# Allegro board EGC_LAB_V100R001.brd
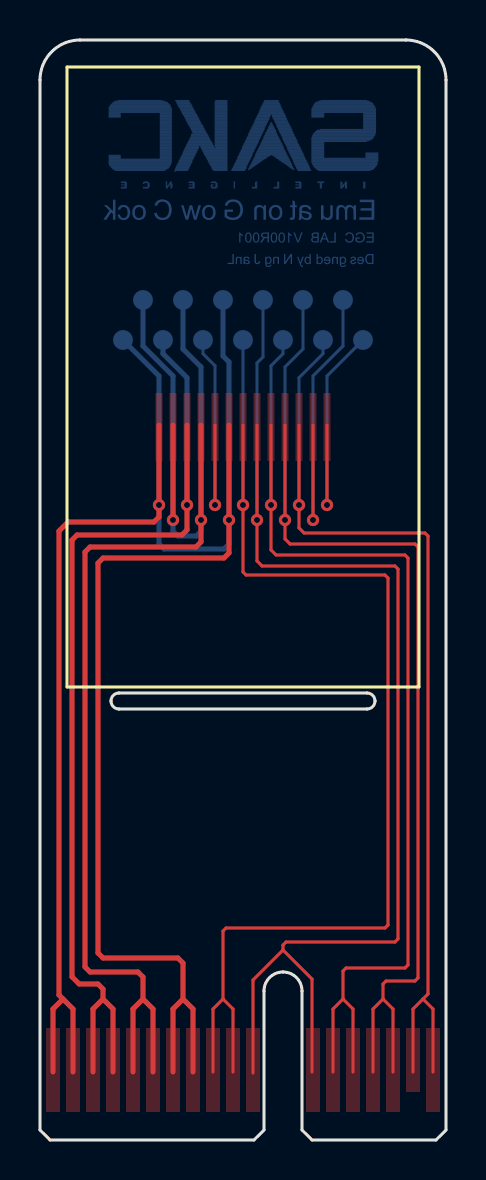
[diagram p0: board, top side]
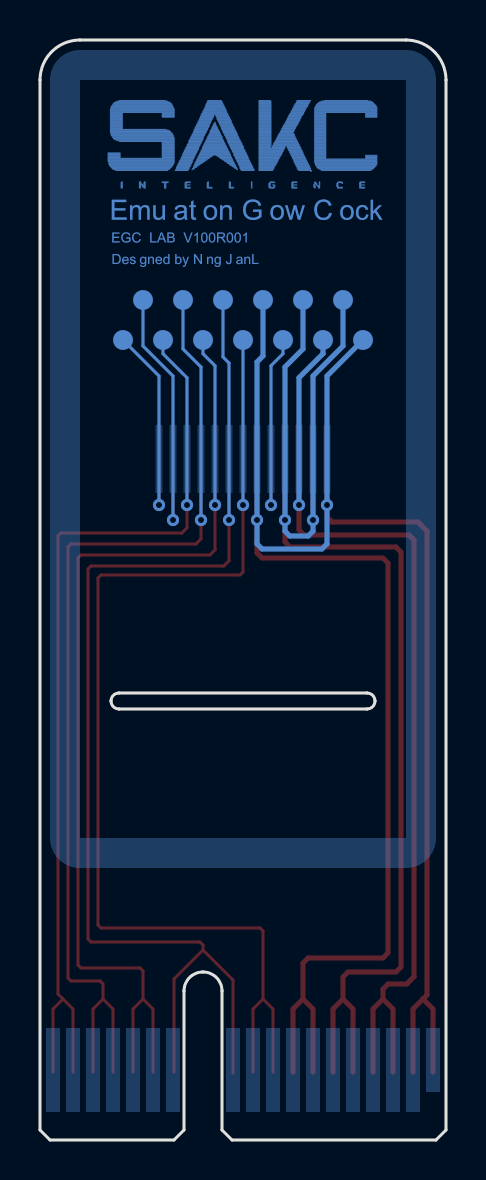
[diagram p1: board, bottom side, seen from below]

Outline 20.3 x 55 mm; copper layers: TOP, BOTTOM. Coordinates in mm from the lower left corner of the outline.
Outline path: 0,53 arc(0.59,54.41) 2,55 18.3,55 arc(19.71,54.41) 20.3,53 20.3,0.5 19.8,0 13.6,0 13.1,0.5 13.1,7.45 arc(12.82,8.12) 12.15,8.4 arc(11.48,8.12) 11.2,7.45 11.2,0.5 10.7,0 0.5,0 0,0.5 0,53 ; 3.55,21.95 arc(3.67,22.23) 3.95,22.35 16.35,22.35 arc(16.63,22.23) 16.75,21.95 arc(16.63,21.67) 16.35,21.55 3.95,21.55 arc(3.67,21.67) 3.55,21.95

## Design rules (mm)
constraint set DEFAULT: min track width 0.152

## Placement (name value [footprint] x y rotation side)
NOREF  -  []  0.5 0 90 top
NOREF#2  -  []  13.64 40 0 top
NOREF#3  -  []  7.64 40 0 top
NOREF#4  -  []  0.5 0 90 top
NOREF#5  -  []  19 2.4 90 top
NOREF#6  -  []  0 0 0 top
NOREF#7  -  []  3.64 40 0 top
NOREF#8  -  []  0 0 0 top
NOREF#9  -  []  4.64 42 0 top
NOREF#10  -  []  8.64 42 0 top
NOREF#11  -  []  5.64 40 0 top
NOREF#12  -  []  13.65 3.5 0 top
NOREF#13  -  []  10.65 3.5 0 top
NOREF#14  -  []  0.65 3.5 0 top
NOREF#15  -  []  0.5 0 90 top
NOREF#16  -  []  6.64 42 0 top
NOREF#17  -  []  0 0.5 0 top
NOREF#18  -  []  15.64 40 0 top
NOREF#19  -  []  9.64 40 0 top
NOREF#20  -  []  11.2 7.45 0 top
NOREF#21  -  []  12.15 7.45 0 top
NOREF#22  -  []  14.64 42 0 top
NOREF#23  -  []  12.64 42 0 top
NOREF#24  -  []  11.64 40 0 top
NOREF#25  -  []  20 1.4 90 top
NOREF#26  -  []  15.3 1.4 0 top
NOREF#27  -  []  10.64 42 0 top
NOREF#28  -  []  16.65 3.5 0 top
TP1  TestPoint1R0  [TP39]  16.15 40 180 bottom
TP2  TestPoint1R0  [TP39]  15.15 42 180 bottom
TP3  TestPoint1R0  [TP39]  14.15 40 180 bottom
TP4  TestPoint1R0  [TP39]  13.15 42 180 bottom
TP5  TestPoint1R0  [TP39]  12.15 40 180 bottom
TP6  TestPoint1R0  [TP39]  11.15 42 180 bottom
TP7  TestPoint1R0  [TP39]  10.15 40 180 bottom
TP8  TestPoint1R0  [TP39]  9.15 42 180 bottom
TP9  TestPoint1R0  [TP39]  8.15 40 180 bottom
TP10  TestPoint1R0  [TP39]  7.15 42 180 bottom
TP11  TestPoint1R0  [TP39]  6.15 40 180 bottom
TP12  TestPoint1R0  [TP39]  5.15 42 180 bottom
TP13  TestPoint1R0  [TP39]  4.15 40 180 bottom

## Library data of the parts
TP1-TP13 = TestPoint1R0

## Footprints (pads in the part's own frame, mm; a bottom-side part is the same pattern mirrored in y, then rotated)
TP39
  round 0.991 smd: 1(0,0)

## Nets
LCD_CS#: TP7.1
LCD_GND: TP8.1 TP13.1
LCD_LEDK: TP11.1
LCD_NC1: TP1.1
LCD_NC2: TP2.1
LCD_NC3: TP9.1
LCD_RS: TP5.1
LCD_RST#: TP6.1
LCD_SCL: TP4.1
LCD_SDA: TP3.1
LCD_VDD: TP10.1 TP12.1

## Via types
v1: diameter 0.61, hole 0.305, TOP to BOTTOM, 13 vias

## Routing (per net, layer and track width the routed paths; a pad name or vN(x,y) marks a point on that pad's centre or on a via; arc(x,y) is an arc through that point)
LCD_CS#: length 59.8
  TOP w0.152: 9.15,7.05 8.65,6.55 8.65,3.4 ; 9.15,7.05 9.65,6.55 9.65,3.4 ; 9.15,7.05 9.15,10.45 9.3,10.6 17.25,10.6 17.4,10.75 17.4,28.1 17.25,28.25 10.3,28.25 10.15,28.4 v1(10.15,31.75) 10.15,35.75
  BOTTOM w0.152: TP7.1 v1(10.15,31.75)
LCD_GND: length 114.7
  TOP w0.254: 0.65,3.4 0.65,6.55 1.15,7.05 ; 7.15,7.05 7.65,6.55 7.65,3.4 ; 7.15,7.05 6.65,6.55 6.65,3.4 ; 7.15,7.05 7.15,8.85 6.9,9.1 3.15,9.1 2.9,9.35 2.9,28.85 3.15,29.1 9.2,29.1 9.45,29.35 v1(9.45,31) 9.45,35.75 ; 1.15,7.05 1.65,6.55 1.65,3.4 ; 1.15,7.05 0.95,7.25 0.95,30.45 1.4,30.9 5.7,30.9 5.95,31.15 v1(5.95,31.75) 5.95,35.75
  BOTTOM w0.254: TP8.1 9.15,39.2 9.45,38.9 v1(9.45,31) 9.45,29.8 9.2,29.55 6.2,29.55 5.95,29.8 v1(5.95,31.75) 5.95,38.2 TP13.1
LCD_LEDK: length 51.8
  TOP w0.254: 3.15,7.05 3.65,6.55 3.65,3.4 ; 3.15,7.05 3.15,7.55 2.9,7.8 1.96,7.8 1.6,8.16 1.6,30 1.85,30.25 7.1,30.25 7.35,30.5 v1(7.35,31.75) 7.35,35.75 ; 3.15,7.05 2.65,6.55 2.65,3.4
  BOTTOM w0.254: v1(7.35,31.75) 7.35,38.11 6.15,39.31 TP11.1
LCD_NC1: length 13
  TOP w0.152: v1(14.35,31.75) 14.35,35.75
  BOTTOM w0.152: v1(14.35,31.75) 14.35,38.2 TP1.1
LCD_NC2: length 16.4
  TOP w0.152: v1(13.65,31) 13.65,35.75
  BOTTOM w0.152: TP2.1 15.15,39.7 13.65,38.2 v1(13.65,31)
LCD_NC3: length 12.5
  TOP w0.152: 8.75,35.75 v1(8.75,31.75)
  BOTTOM w0.152: TP9.1 8.15,39.31 8.75,38.71 v1(8.75,31.75)
LCD_RS: length 54.6
  TOP w0.152: 11.55,35.75 v1(11.55,31.75) 11.55,29.5 11.8,29.25 18.25,29.25 18.4,29.1 18.4,8.75 18.25,8.6 15.3,8.6 15.15,8.45 15.15,7.05 ; 15.15,7.05 14.65,6.55 14.65,3.4 ; 15.15,7.05 15.65,6.55 15.65,3.4
  BOTTOM w0.152: v1(11.55,31.75) 11.55,38.71 12.15,39.31 TP5.1
LCD_RST#: length 63.2
  TOP w0.152: 13.6,3.4 13.6,8.05 12.15,9.5 ; 10.85,35.75 v1(10.85,31) 10.85,28.95 11.1,28.7 17.75,28.7 17.9,28.55 17.9,10.05 17.75,9.9 12.3,9.9 12.15,9.75 12.15,9.5 ; 12.15,9.5 10.65,8 10.65,3.35
  BOTTOM w0.152: TP6.1 11.15,39.15 10.85,38.85 v1(10.85,31)
LCD_SCL: length 55.8
  TOP w0.152: 17.15,7.05 16.65,6.55 16.65,3.4 ; 17.15,7.05 17.15,7.8 17.3,7.95 18.75,7.95 18.9,8.1 18.9,29.65 18.75,29.8 12.5,29.8 12.25,30.05 v1(12.25,31) 12.25,35.75 ; 17.15,7.05 17.65,6.55 17.65,3.4
  BOTTOM w0.152: TP4.1 13.15,39.55 12.25,38.65 v1(12.25,31)
LCD_SDA: length 51.5
  TOP w0.152: 19.15,7.05 19.65,6.55 19.65,3.4 ; 19.15,7.05 18.65,6.55 18.65,3.4 ; 19.15,7.05 19.4,7.3 19.4,30.2 19.25,30.35 13.2,30.35 12.95,30.6 v1(12.95,31.75) 12.95,35.75
  BOTTOM w0.152: v1(12.95,31.75) 12.95,38.11 14.15,39.31 TP3.1
LCD_VDD: length 75
  TOP w0.254: 5.15,7.05 5.65,6.55 5.65,3.4 ; 5.15,7.05 5.15,8.15 4.9,8.4 2.5,8.4 2.25,8.65 2.25,29.4 2.5,29.65 7.8,29.65 8.05,29.9 v1(8.05,31) 8.05,35.75 ; 5.15,7.05 4.65,6.55 4.65,3.4 ; 6.65,35.75 v1(6.65,31)
  BOTTOM w0.254: TP12.1 5.15,39.7 6.65,38.2 v1(6.65,31) 6.65,30.44 6.89,30.2 7.81,30.2 8.05,30.44 v1(8.05,31) 8.05,38.65 7.15,39.55 TP10.1

## Copper pours and planes (outline as drawn; the poured copper is in the pictures)
LCD_CS# on TOP: 10,1.4 10,5.6 9.3,5.6 9.3,1.4
LCD_CS# on TOP: 9.97,33.95 9.97,37.35 10.32,37.35 10.32,33.95
LCD_CS# on TOP: 9,1.4 9,5.6 8.3,5.6 8.3,1.4
LCD_CS# on BOTTOM: 9.97,32.35 9.97,35.75 10.32,35.75 10.32,32.35
LCD_GND on TOP: 2,1.4 2,5.6 1.3,5.6 1.3,1.4
LCD_GND on TOP: 9.28,33.95 9.28,37.35 9.62,37.35 9.62,33.95
LCD_GND on TOP: 7,1.4 7,5.6 6.3,5.6 6.3,1.4
LCD_GND on TOP: 8,1.4 8,5.6 7.3,5.6 7.3,1.4
LCD_GND on TOP: 1,1.4 1,5.6 0.3,5.6 0.3,1.4
LCD_GND on TOP: 5.78,33.95 5.78,37.35 6.12,37.35 6.12,33.95
LCD_GND on BOTTOM: 5.78,32.35 5.78,35.75 6.12,35.75 6.12,32.35
LCD_GND on BOTTOM: 9.28,32.35 9.28,35.75 9.62,35.75 9.62,32.35
LCD_LEDK on TOP: 3,1.4 3,5.6 2.3,5.6 2.3,1.4
LCD_LEDK on TOP: 4,1.4 4,5.6 3.3,5.6 3.3,1.4
LCD_LEDK on TOP: 7.17,33.95 7.17,37.35 7.53,37.35 7.53,33.95
LCD_LEDK on BOTTOM: 7.17,32.35 7.17,35.75 7.53,35.75 7.53,32.35
LCD_NC1 on TOP: 14.18,33.95 14.18,37.35 14.53,37.35 14.53,33.95
LCD_NC1 on BOTTOM: 14.18,32.35 14.18,35.75 14.53,35.75 14.53,32.35
LCD_NC2 on TOP: 13.47,33.95 13.47,37.35 13.82,37.35 13.82,33.95
LCD_NC2 on BOTTOM: 13.47,32.35 13.47,35.75 13.82,35.75 13.82,32.35
LCD_NC3 on TOP: 8.57,33.95 8.57,37.35 8.93,37.35 8.93,33.95
LCD_NC3 on BOTTOM: 8.57,32.35 8.57,35.75 8.93,35.75 8.93,32.35
LCD_RS on TOP: 16,1.4 16,5.6 15.3,5.6 15.3,1.4
LCD_RS on TOP: 15,1.4 15,5.6 14.3,5.6 14.3,1.4
LCD_RS on TOP: 11.38,33.95 11.38,37.35 11.72,37.35 11.72,33.95
LCD_RS on BOTTOM: 11.38,32.35 11.38,35.75 11.72,35.75 11.72,32.35
LCD_RST# on TOP: 10.68,33.95 10.68,37.35 11.03,37.35 11.03,33.95
LCD_RST# on TOP: 11,1.4 11,5.6 10.3,5.6 10.3,1.4
LCD_RST# on TOP: 14,1.4 14,5.6 13.3,5.6 13.3,1.4
LCD_RST# on BOTTOM: 10.68,32.35 10.68,35.75 11.03,35.75 11.03,32.35
LCD_SCL on TOP: 17,1.4 17,5.6 16.3,5.6 16.3,1.4
LCD_SCL on TOP: 12.07,33.95 12.07,37.35 12.43,37.35 12.43,33.95
LCD_SCL on TOP: 18,1.4 18,5.6 17.3,5.6 17.3,1.4
LCD_SCL on BOTTOM: 12.07,32.35 12.07,35.75 12.43,35.75 12.43,32.35
LCD_SDA on TOP: 19,2.4 19,5.6 18.3,5.6 18.3,2.4
LCD_SDA on TOP: 12.78,33.95 12.78,37.35 13.12,37.35 13.12,33.95
LCD_SDA on TOP: 20,1.4 20,5.6 19.3,5.6 19.3,1.4
LCD_SDA on BOTTOM: 12.78,32.35 12.78,35.75 13.12,35.75 13.12,32.35
LCD_VDD on TOP: 5,1.4 5,5.6 4.3,5.6 4.3,1.4
LCD_VDD on TOP: 6,1.4 6,5.6 5.3,5.6 5.3,1.4
LCD_VDD on TOP: 6.47,33.95 6.47,37.35 6.83,37.35 6.83,33.95
LCD_VDD on TOP: 7.88,33.95 7.88,37.35 8.22,37.35 8.22,33.95
LCD_VDD on BOTTOM: 7.88,32.35 7.88,35.75 8.22,35.75 8.22,32.35
LCD_VDD on BOTTOM: 6.47,32.35 6.47,35.75 6.83,35.75 6.83,32.35
Net_73 on BOTTOM: 2,54.5 0.94,54.06 0.5,53 0.5,15.1 0.94,14.04 2,13.6 18.3,13.6 19.36,14.04 19.8,15.1 19.8,53 19.36,54.06 18.3,54.5 ; 1 cut-out
Net_74 on BOTTOM: 9,1.4 9,5.6 8.3,5.6 8.3,1.4
Net_74 on BOTTOM: 20,1.4 20,5.6 19.3,5.6 19.3,1.4
Net_74 on BOTTOM: 2,1.4 2,5.6 1.3,5.6 1.3,1.4
Net_74 on BOTTOM: 19,1.4 19,5.6 18.3,5.6 18.3,1.4
Net_74 on BOTTOM: 3,1.4 3,5.6 2.3,5.6 2.3,1.4
Net_74 on BOTTOM: 14,1.4 14,5.6 13.3,5.6 13.3,1.4
Net_74 on BOTTOM: 1,2.4 1,5.6 0.3,5.6 0.3,2.4
Net_74 on BOTTOM: 6,1.4 6,5.6 5.3,5.6 5.3,1.4
Net_74 on BOTTOM: 7,1.4 7,5.6 6.3,5.6 6.3,1.4
Net_74 on BOTTOM: 18,1.4 18,5.6 17.3,5.6 17.3,1.4
Net_74 on BOTTOM: 4,1.4 4,5.6 3.3,5.6 3.3,1.4
Net_74 on BOTTOM: 16,1.4 16,5.6 15.3,5.6 15.3,1.4
Net_74 on BOTTOM: 5,1.4 5,5.6 4.3,5.6 4.3,1.4
Net_74 on BOTTOM: 17,1.4 17,5.6 16.3,5.6 16.3,1.4
Net_74 on BOTTOM: 15,1.4 15,5.6 14.3,5.6 14.3,1.4
Net_74 on BOTTOM: 10,1.4 10,5.6 9.3,5.6 9.3,1.4
Net_74 on BOTTOM: 11,1.4 11,5.6 10.3,5.6 10.3,1.4
Net_74 on BOTTOM: 8,1.4 8,5.6 7.3,5.6 7.3,1.4

Small or netless copper shapes (teardrops, artwork), in the pictures only: 44 on BOTTOM

## Text on the board
Ref Des/Silkscreen Bottom: REV. | SIZE | SCALE | DROWN BY : | CHECKED BY : | APPROVAL BY : | SHEET 1 OF 1 | DROWN NO : xxxxxxxx | NING.JIANLI | 2021-08-17 | A | B | C | D | V1R1 | A3 | 5 | 1:1 | Emulation Glow Clock | 4 | 3 | 2 | 1
Ref Des/Silkscreen Top: V1R1 | REV | 20210817 | DATE | Ning.JianLi | DESIGNER | DROWN BY : | CHECKED BY : | APPROVAL BY : | Initial Version. | REVISIONS | DESCRIPTION | SIZE | SCALE | REV. | NING.JIANLI | 2021-08-17 | DROWN NO : xxxxxxxx | SHEET 1 OF 1 | A | B | C | D | 1 | 2 | 3 | 4 | Emulation Glow Clock | 1:1 | 5 | A3
DIMENSION: BOARD NAME : | LAYERS : 02 | SilkScreen color: | SolderMask color: | Surface Finished: | Dielectric Material: | Tg: | Compare With IPC File: | EGC_LAB_V100R001 | If the stackup more than 8 layer(include 8 layer) default TG must be 170C | White | Green | HASL(Sn/Pb) | OSP | Golden Finger,Others HASL(Pb-Free) | Golden Finger,Ohters HASL(Sn/Pb) | FR-4 | Default | Yes | Yellow | Blue | HASL(Pb-Free) | ImAg | Other | Mid-Tg 150 C | No | BOARD THICKNESS : 1.60 mm+/-10% | Panel Mode : 1x1 | Black | Red | Immersion Gold | ImSn | Golden Finger,Others ENIG | Golden Finger,Others OSP | Hi-Tg 170 C | DROWN BY : | CHECKED BY : | APPROVAL BY : | XXXXX | SIZE | SCALE | REV. | NING.JIANLI | 2021-08-17 | DROWN NO : xxxxxxxx | SHEET 1 OF 1 | A | B | C | D | 1 | 2 | 3 | 4 | Emulation Glow Clock | 1:1 | 5 | A3 | V1R1
NCLEGEND-1-2: FIGURE | FINISHED_SIZE | 0.3048 | DRILL CHART: TOP to BOTTOM | ALL UNITS ARE IN MILLIMETERS | PLATED | QTY | 13
